# Altium PCB LCD3.5.PcbDoc
Units mm, origin at the board's own origin, x right, y up, seen from the top; angles counter-clockwise.
Board outline 54.74 x 95.63 mm, 2 copper layers (Top Layer, Bottom Layer); 20 components, 48 nets, 124 pads, 80 vias.
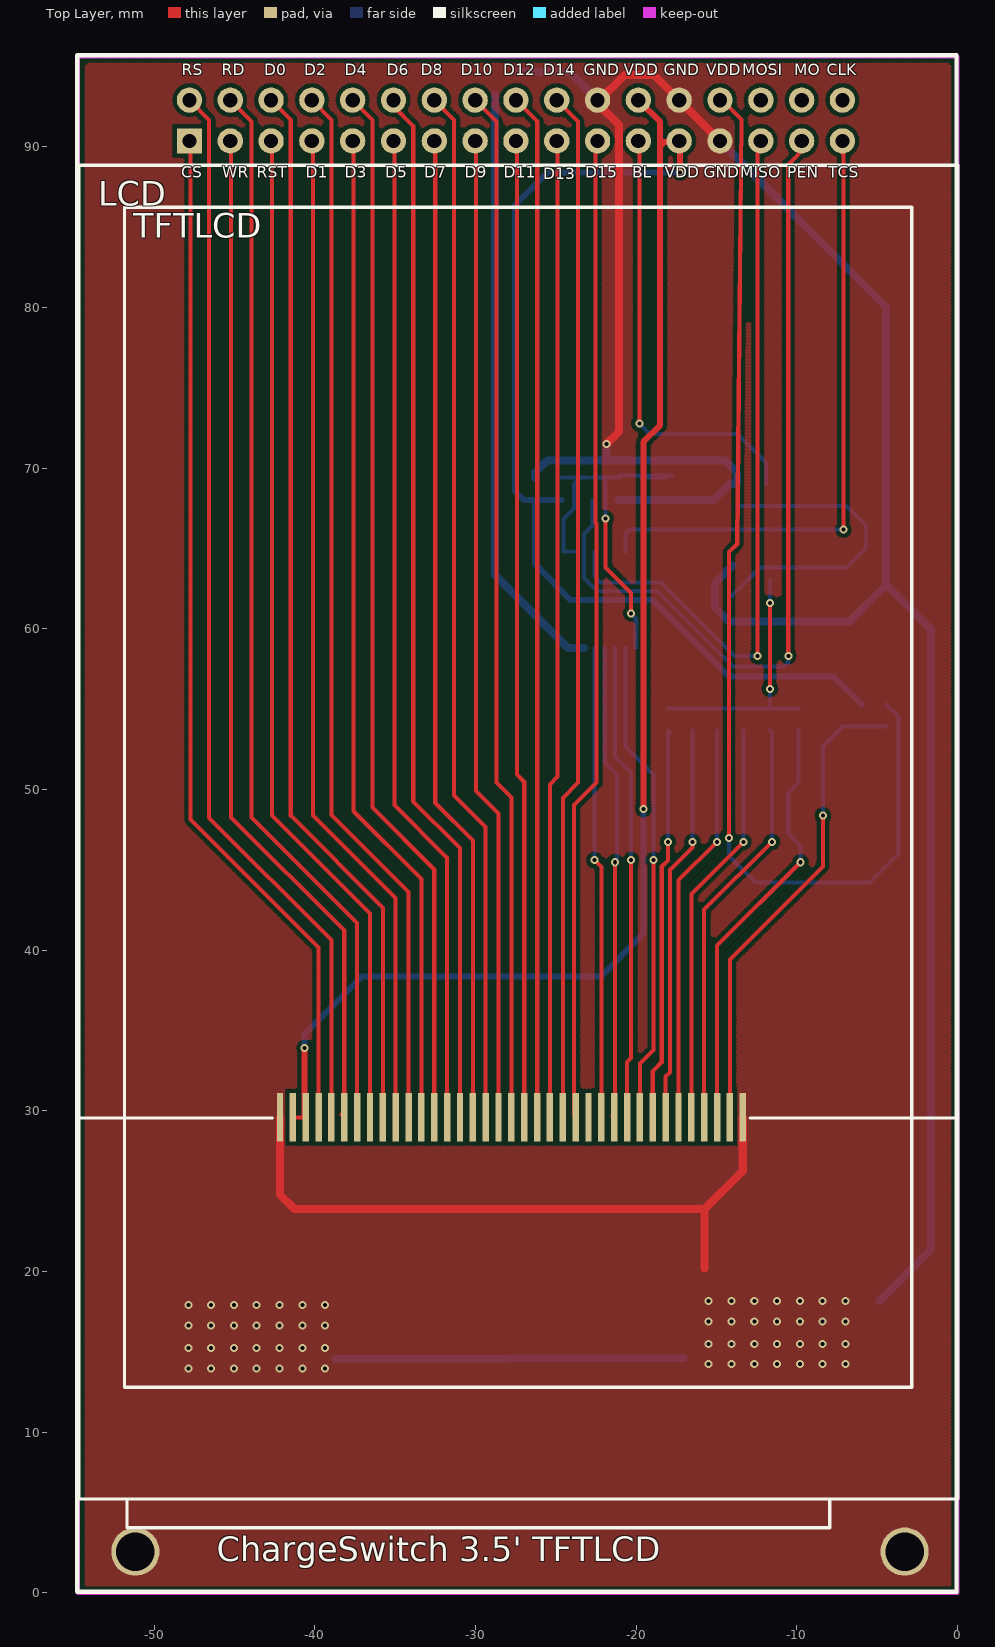
[diagram p0: Top Layer view]
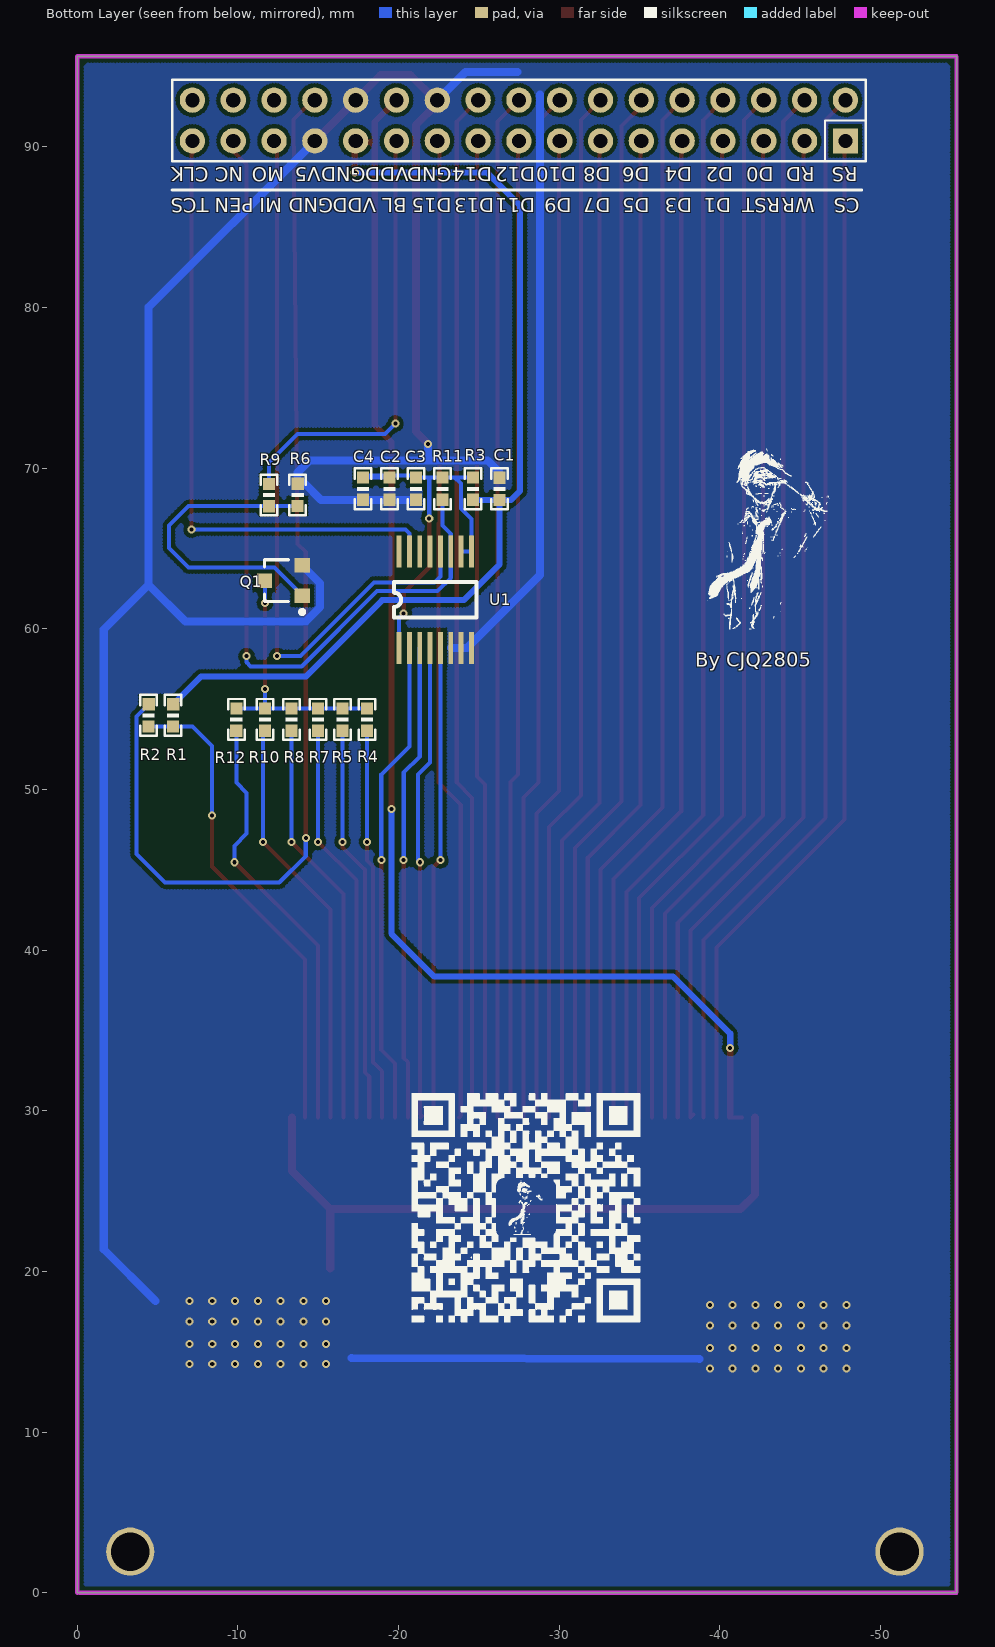
[diagram p1: Bottom Layer view, seen from below]

## Layer stack, top to bottom
Top Solder: solder mask 0.0102, Solder Resist, Dk 3.5
Top Layer: signal copper 0.0356
Dielectric 1: dielectric 0.32, FR-4, Dk 4.8
Bottom Layer: signal copper 0.0356
Bottom Solder: solder mask 0.0102, Solder Resist, Dk 3.5

## Board outline
-54.737,0 -54.737,95.631 0,95.631 0,0

## Design rules (kind name [scope] priority, off if disabled: settings)
Clearance [All] p1: gap=0.254 ignorepadtopadclearanceinfootprint=FALSE except(0: Arc-Hole Track-Hole SMDPad-Hole THPad-Hole Via-Hole Fill-Hole Poly-Hole Region-Hole Text-Hole)
PlaneClearance [All] p1: clearance=0.5
PlaneConnect [All] p1: planeconnectstyle=Direct reliefexpansion=0.508 reliefentries=4 reliefconductorwidth=0.254 reliefairgap=0.254
PolygonConnect [All] p1: connectstyle=Direct reliefconductorwidth=0.254 reliefentries=4 polygonreliefangle="90 Angle" airgapwidth=0.254
RoutingVias [All] p1: holewidth=0.711 width=1.27 viastyle="Through Hole" minholewidth=0.711 minwidth=1.27 maxholewidth=0.711 maxwidth=1.27
SolderMaskExpansion [All] p1: expansion=0.102
Width [All] p1: maxlimit=0.254 minlimit=0.254 preferedwidth=0.254
28 further rules are at their usual default settings.

## Components (designator, comment, footprint, x,y, rotation, side; value= is the part's Value field where it differs from the comment)
C1 "104" 0603P -26.289,68.707 r270 bottom
C2 "10uF" 0603P -19.43,68.707 r90 bottom
C3 "104" 0603P -21.08,68.707 r90 bottom
C4 "104" 0603P -17.779,68.707 r90 bottom
LCD "TFT_LCD2" DB2*17-3.5 -54.795,95.694 r0 top
Q1 "S8050" SOT-23R -12.954,62.992 r90 bottom
R1 "0R" 0603P -5.969,54.61 r270 bottom
R2 "0R" 0603P -4.445,54.61 r270 bottom
R3 "10R" 0603P -24.635,68.707 r90 bottom
R4 "10R" 0603P -18.034,54.356 r270 bottom
R5 "10R" 0603P -16.51,54.356 r270 bottom
R6 "10K" 0603P -13.716,68.326 r90 bottom
R7 "10R" 0603P -14.986,54.356 r270 bottom
R8 "10R" 0603P -13.335,54.356 r270 bottom
R9 "1K" 0603P -11.938,68.326 r270 bottom
R10 "10R" 0603P -11.684,54.356 r270 bottom
R11 "100K" 0603P -22.733,68.707 r90 bottom
R12 "10R" 0603P -9.906,54.356 r270 bottom
TFTLCD "TFT3.5'" TFT3.5' -54.7,5.842 r0 top
U1 "XPT2046" SSOP16 -20.034,58.801 r90 bottom

## Footprints (in the part's own frame and the unit in brackets; to place one, negate y for a bottom-side part, rotate by r counter-clockwise, add the part's x,y. Pads: shape width x height; smd on the part's side, far side on the other; paste and mask are expansions set on the pad)
0603P [mil]
  rect 30x30 smd: 1(-27,0) 2(27.5,-0.06)
  silkscreen extent -50,-20 50,20
DB2*17-3.5 [mil]
  rect 62x62 hole 35: 1(275,-210)
  round 62 hole 35: 2(275,-110) 3(375,-210) 4(375,-110) 5(475,-210) 6(475,-110) 7(575,-210) 8(575,-110) 9(675,-210) 10(675,-110) 11(775,-210) 12(775,-110) 13(875,-210) 14(875,-110) 15(975,-210) 16(975,-110) 17(1075,-210) 18(1075,-110) 19(1175,-210) 20(1175,-110) 21(1275,-210) 22(1275,-110) 23(1375,-210) 24(1375,-110) 25(1475,-210) 26(1475,-110) 27(1575,-210) 28(1575,-110) 29(1675,-210) 30(1675,-110) 31(1775,-210) 32(1775,-110) 33(1875,-210) 34(1875,-110)
  silkscreen extent 0,-3765 2155,0
SOT-23R [mm]
  rect 0.9x0.95 smd: 1(0.95,-1.048) 2(-0.95,-1.048) 3(0,1.302)
  silkscreen extent -2.07,-1.17 1.3,1.3
SSOP16 [mm]
  rect 2x0.3 smd: 1(0,0) 2(0,-0.643) 3(0,-1.286) 4(0,-1.929) 5(0,-2.572) 6(0,-3.215) 7(0,-3.858) 8(0,-4.501) 9(6,-4.501) 10(6,-3.858) 11(6,-3.215) 12(6,-2.572) 13(6,-1.929) 14(6,-1.286) 15(6,-0.643) 16(6,0)
  silkscreen extent 1.89,-4.82 4.11,0.32
TFT3.5' [mm]
  rect 0.4x3 smd: 1(12.526,23.749) 2(13.326,23.749) 3(14.126,23.749) 4(14.926,23.749) 5(15.726,23.749) 6(16.526,23.749) 7(17.326,23.749) 8(18.126,23.749) 9(18.926,23.749) 10(19.726,23.749) 11(20.526,23.749) 12(21.326,23.749) 13(22.126,23.749) 14(22.926,23.749) 15(23.726,23.749) 16(24.526,23.749) 17(25.326,23.749) 18(26.126,23.749) 19(26.926,23.749) 20(27.726,23.749) 21(28.526,23.749) 22(29.326,23.749) 23(30.126,23.749) 24(30.926,23.749) 25(31.726,23.749) 26(32.526,23.749) 27(33.326,23.749) 28(34.126,23.749) 29(34.926,23.749) 30(35.726,23.749) 31(36.526,23.749) 32(37.326,23.749) 33(38.126,23.749) 34(38.926,23.749) 35(39.726,23.749) 36(40.526,23.749) 37(41.326,23.749)
  silkscreen extent 0,-1.8 54.7,83

## Part data
C1 C2 C3 C4: library part C
Q1: library part NPN, "8050/BCW846/BCW847"
R1 R2 R3 R4 R5 R6 R7 R8 R9 R10 R11 R12: library part R
TFTLCD: "3.5寸,带触摸,分辨率:480*320"
U1: library part ADS7843

## Free pads (board coordinates)
  round 3 hole 2.4: 5(-51.177,2.56) 5(-3.3,2.56)

## Via types
v1: diameter 0.5, hole 0.25, Top Layer to Bottom Layer, 78 vias
v2: diameter 0.5, hole 0.25, Top Layer to Bottom Layer, tented both sides, 2 vias

## Nets (pads, with @x,y where several pads share a name; then routed paths per layer and width w, separated by ;. In a path a pad name is that pad's centre, name@x,y a point inside that pad or via, vN(x,y) a via of type N, cw(c..) or ccw(c..) an arc to the next point about the centre after c; other vN are vias at no path point)
BL_CTR: LCD.23 R9.1 | length 28
  Top Layer w0.254: v2(-19.812,72.771) -19.812,89.789 -19.685,89.916 -19.939,90.17 LCD.23@-19.812,90.297
  Bottom Layer w0.254: v2(-19.812,72.771) -19.166,72.125 -13.705,72.125 -11.938,70.358 R9.1
BL_VDD: LCD.28 R2.1 | length 69.4
  Top Layer w0.254: LCD.28@-14.732,92.837 -14.605,92.837 -13.462,91.694 -13.716,65.279 ; v1(-14.224,46.99) -14.224,64.77 -13.716,65.278
  Bottom Layer w0.254: v1(-14.224,46.99) -14.224,45.847 -12.573,44.196 -5.461,44.196 -3.681,45.976 -3.681,54.532 R2.1
CLK: LCD.34
GND: C1.1 C2.1 C3.1 C4.1 LCD.22 LCD.26 LCD.27 pad.5 Q1.1 R6.2 TFTLCD.1 TFTLCD.37 U1.6 U1.7 U1.8 | length 255.9
  Top Layer w0.5: TFTLCD.1 -42.174,24.775 -41.275,23.876 -15.748,23.876 ; v1(-21.844,71.501) -21.082,72.263 -21.082,91.364 -22.352,92.634 -22.352,92.837 -20.739,94.45 -18.885,94.45 LCD.27@-14.732,90.297 ; -15.748,20.19 -15.748,23.876 ; TFTLCD.37 -13.374,26.25 -15.748,23.876
  Bottom Layer w0.5: -38.735,14.555 -17.067,14.605 ; -28.804,93.239 -28.804,63.348 -24.257,58.801 U1.7 U1.6 ; -27.392,94.65 -24.165,94.65 LCD.22@-22.352,92.837 ; C1.1 -26.289,69.723 -25.527,70.485 -21.844,70.485 ; v1(-21.844,71.501) -21.844,70.485 ; C3.1@-21.105,68.023 C4.1@-17.804,68.023 ; C4.1 -15.179,68.021 -14.176,69.025 R6.2 -13.718,69.725 -14.478,70.485 -21.844,70.485 ; LCD.27@-14.732,90.297 -4.445,80.01 -4.445,62.738 ; Q1.1 -15.113,62.831 -15.113,61.341 -14.224,60.452 -6.731,60.452 -4.445,62.738 ; -4.867,18.161 -1.651,21.377 -1.651,59.944 -4.445,62.738
  other v1: -47.879,13.97 -46.461,13.97 -45.043,13.97 -43.625,13.97 -42.206,13.97 -40.788,13.97 -39.37,13.97 -15.494,14.224 -14.076,14.224 -12.658,14.224 -11.24,14.224 -9.821,14.224 -8.403,14.224 -6.985,14.224 -47.879,15.24 -46.461,15.24 -45.043,15.24 -43.625,15.24 -42.206,15.24 -40.788,15.24 -39.37,15.24 -15.494,15.494 -14.076,15.494 -12.658,15.494 -11.24,15.494 -9.821,15.494 -8.403,15.494 -6.985,15.494 -47.879,16.637 -46.461,16.637 -45.043,16.637 -43.625,16.637 -42.206,16.637 -40.788,16.637 -39.37,16.637 -15.494,16.891 -14.076,16.891 -12.658,16.891 -11.24,16.891 -9.821,16.891 -8.403,16.891 -6.985,16.891 -47.879,17.907 -46.461,17.907 -45.043,17.907 -43.625,17.907 -42.206,17.907 -40.788,17.907 -39.37,17.907 -15.494,18.161 -14.076,18.161 -12.658,18.161 -11.24,18.161 -9.821,18.161 -8.403,18.161 -6.985,18.161
LCD_CS: LCD.1 TFTLCD.4 | length 64
  Top Layer w0.254: LCD.1@-47.752,90.297 -47.752,48.133 -39.774,40.155 TFTLCD.4
LCD_D0: LCD.6 TFTLCD.9 | length 66.1
  Top Layer w0.254: LCD.6@-42.672,92.837 -41.504,91.669 -41.504,48.362 -35.774,42.632 TFTLCD.9
LCD_D1: LCD.7 TFTLCD.10 | length 62.8
  Top Layer w0.254: LCD.7@-40.132,90.297 -40.132,48.387 -34.974,43.229 TFTLCD.10
LCD_D2: LCD.8 TFTLCD.11 | length 65.7
  Top Layer w0.254: LCD.8@-40.132,92.837 -38.964,91.669 -38.964,48.412 -34.174,43.623 TFTLCD.11
LCD_D3: LCD.9 TFTLCD.12 | length 62.5
  Top Layer w0.254: LCD.9@-37.592,90.297 -37.592,48.641 -33.374,44.423 TFTLCD.12
LCD_D4: LCD.10 TFTLCD.13 | length 65.3
  Top Layer w0.254: LCD.10@-37.592,92.837 -36.424,91.669 -36.424,48.87 -32.574,45.02 TFTLCD.13
LCD_D5: LCD.11 TFTLCD.14 | length 62.1
  Top Layer w0.254: LCD.11@-35.052,90.297 -35.052,49.022 -31.774,45.744 TFTLCD.14
LCD_D6: LCD.12 TFTLCD.15 | length 64.9
  Top Layer w0.254: LCD.12@-35.052,92.837 -35.052,92.456 -33.884,91.288 -33.884,49.251 -30.974,46.341 TFTLCD.15
LCD_D7: LCD.13 TFTLCD.16 | length 61.7
  Top Layer w0.254: LCD.13@-32.512,90.297 -32.512,49.149 -30.174,46.811 TFTLCD.16
LCD_D8: LCD.14 TFTLCD.17 | length 64.5
  Top Layer w0.254: LCD.14@-32.512,92.837 -31.344,91.669 -31.344,49.632 -29.374,47.662 TFTLCD.17
LCD_D9: LCD.15 TFTLCD.18 | length 61.3
  Top Layer w0.254: LCD.15@-29.972,90.297 -29.972,49.911 -28.574,48.513 TFTLCD.18
LCD_D10: LCD.16 TFTLCD.19 | length 64.2
  Top Layer w0.254: LCD.16@-29.972,92.837 -28.702,91.567 -28.702,50.419 -27.774,49.491 TFTLCD.19
LCD_D11: LCD.17 TFTLCD.20 | length 60.9
  Top Layer w0.254: LCD.17@-27.432,90.297 -27.432,50.927 -26.974,50.469 TFTLCD.20
LCD_D12: LCD.18 TFTLCD.21 | length 63.8
  Top Layer w0.254: LCD.18@-27.432,92.837 -26.162,91.567 -26.162,29.603 TFTLCD.21
LCD_D13: LCD.19 TFTLCD.22 | length 60.9
  Top Layer w0.254: TFTLCD.22 -25.374,50.318 -24.892,50.8 LCD.19@-24.892,90.297
LCD_D14: LCD.20 TFTLCD.23 | length 64.2
  Top Layer w0.254: LCD.20@-24.892,92.837 -23.622,91.567 -23.622,50.419 -24.574,49.467 TFTLCD.23
LCD_D15: LCD.21 TFTLCD.24 | length 61.4
  Top Layer w0.254: TFTLCD.24 -23.872,29.689 -23.872,49.026 -22.475,50.423 -22.475,66.541 -22.539,66.605 -22.539,90.11 LCD.21@-22.352,90.297
LCD_RD: LCD.4 TFTLCD.7 | length 66.5
  Top Layer w0.254: LCD.4@-45.212,92.837 -43.942,91.567 -43.942,48.26 -37.374,41.692 TFTLCD.7
LCD_RS: LCD.2 TFTLCD.5 | length 66.9
  Top Layer w0.254: LCD.2@-47.752,92.837 -46.584,91.669 -46.584,48.235 -38.974,40.625 TFTLCD.5
LCD_RST: LCD.5 TFTLCD.8 | length 63.2
  Top Layer w0.254: LCD.5@-42.672,90.297 -42.672,48.387 -36.574,42.289 TFTLCD.8
LCD_WR: LCD.3 TFTLCD.6 | length 63.9
  Top Layer w0.254: LCD.3@-45.212,90.297 -45.212,48.26 -38.174,41.222 TFTLCD.6 TFTLCD.6@-38.354,29.771
LEDA: R1.2 R2.2 TFTLCD.36 | length 30
  Top Layer w0.254: TFTLCD.36 -14.174,39.42 -8.382,45.212 v1(-8.382,48.387)
  Bottom Layer w0.254: v1(-8.382,48.387) -8.382,52.705 -7.175,53.911 R1.2 R2.2
LEDK1: R4.2 TFTLCD.30 | length 24.6
  Top Layer w0.254: TFTLCD.30 -18.974,32.461 -18.415,33.02 -18.415,45.209 -18.034,45.59 v1(-18.034,46.736)
  Bottom Layer w0.254: v1(-18.034,46.736) -18.034,53.405 -17.907,53.532 R4.2
LEDK2: R5.2 TFTLCD.31 | length 25
  Top Layer w0.254: TFTLCD.31 -18.174,32.118 -17.907,32.385 -17.907,44.998 -16.51,46.395 v2(-16.51,46.738)
  Bottom Layer w0.254: v2(-16.51,46.738) -16.51,46.612 -16.508,46.611 R5.2
LEDK3: R7.2 TFTLCD.32 | length 25.1
  Top Layer w0.254: TFTLCD.32 -17.374,44.348 v1(-14.986,46.736)
  Bottom Layer w0.254: v1(-14.986,46.736) -14.984,46.738 R7.2
LEDK4: R8.2 TFTLCD.33 | length 25.4
  Top Layer w0.254: TFTLCD.33 -16.574,43.497 v1(-13.335,46.736)
  Bottom Layer w0.254: v1(-13.335,46.736) -13.333,46.738 R8.2
LEDK5: R10.2 TFTLCD.34 | length 25.9
  Top Layer w0.254: TFTLCD.34 -15.774,42.519 v1(-11.557,46.736)
  Bottom Layer w0.254: R10.2 -11.557,53.532 v1(-11.557,46.736)
LEDK6: R12.2 TFTLCD.35 | length 26.8
  Top Layer w0.254: TFTLCD.35 -14.974,40.271 v1(-9.779,45.466)
  Bottom Layer w0.254: R12.2 -9.904,50.421 -10.541,49.784 -10.541,47.244 -9.779,46.482 v1(-9.779,45.466)
MO: LCD.32
MOSI: LCD.30
NetQ1_2: Q1.2 R6.1 R9.2 | length 19.5
  Bottom Layer w0.254: Q1.2 -14.002,62.106 -12.285,63.823 -6.916,63.823 -5.715,65.024 -5.715,66.421 -6.921,67.627 R9.2 -11.949,67.64 R6.1
NetQ1_3: Q1.3 R4.1 R5.1 R7.1 R8.1 R10.1 R12.1 | length 16.1
  Top Layer w0.254: v1(-11.684,56.261) v1(-11.684,61.595)
  Bottom Layer w0.254: R4.1 R5.1 R7.1 R8.1 R10.1 ; v1(-11.684,56.261) R10.1 ; v1(-11.684,61.595) -11.684,62.96 Q1.3 ; R12.1 R10.1
T_BUSY: U1.13
T_CLK: U1.16
T_CS: LCD.33 U1.15 | length 39.3
  Top Layer w0.254: v1(-7.112,66.167) -7.112,89.535 -7.493,89.916 LCD.33@-7.112,90.297
  Bottom Layer w0.254: U1.15 -20.677,65.937 -20.432,66.182 -7.127,66.182 v1(-7.112,66.167)
T_MISO: LCD.29 U1.12 | length 45.9
  Top Layer w0.254: v1(-12.446,58.293) -12.446,90.043 LCD.29@-12.192,90.297
  Bottom Layer w0.254: U1.12 -22.606,63.246 -22.225,62.865 -18.459,62.865 -13.887,58.293 v1(-12.446,58.293)
T_MOSI: U1.14
T_PEN: LCD.31 R11.1 U1.11 | length 53.1
  Top Layer w0.254: v1(-10.541,58.293) -10.541,88.9 -9.398,90.043 LCD.31@-9.652,90.297
  Bottom Layer w0.254: R11.1 -22.733,66.421 -23.249,65.905 U1.11 -23.249,63.171 -22.435,62.357 -18.669,62.357 -13.974,57.662 -10.795,57.662 -10.541,57.916 v1(-10.541,58.293)
TVDD: C2.2 C3.2 C4.2 R3.2 R11.2 U1.1 U1.9 U1.10 | length 25.3
  Top Layer w0.254: v1(-21.908,66.866) -21.908,63.818 -20.32,62.23 v1(-20.32,60.96)
  Bottom Layer w0.254: R3.2 -23.495,69.406 ; U1.10 U1.9 -24.535,66.821 -23.873,67.482 -23.873,69.027 -23.495,69.406 ; R11.2@-22.987,69.406 -23.495,69.406 ; R11.2 -21.908,69.406 ; v1(-21.908,66.866) -21.908,69.406 ; C3.2 -21.908,69.406 ; C3.2@-21.082,69.532 C4.2@-17.781,69.532 ; v1(-20.32,60.96) -20.034,60.674 U1.1 ; C2.2@-19.686,69.406 C2.2 C4.2@-18.036,69.406
VCC3.3: C1.2 LCD.24 LCD.25 R1.1 R3.1 TFTLCD.2 TFTLCD.3 | length 145.7
  Top Layer w0.254: TFTLCD.2 TFTLCD.3 TFTLCD.3@-40.64,29.657
  Top Layer w0.381: TFTLCD.3@-40.64,29.657 v1(-40.64,33.909) ; LCD.24@-19.812,92.837 -18.519,91.544 -18.519,90.043 ; v1(-19.558,48.768) -19.558,71.632 -18.519,72.671 -18.519,90.043 ; v1(-17.272,88.392) -17.272,90.297 -18.265,90.297 -18.519,90.043
  Bottom Layer w0.254: R3.1@-24.648,68.008 R3.1
  Bottom Layer w0.381: v1(-40.64,33.909) -40.64,34.798 -37.084,38.354 -22.225,38.354 -19.558,41.021 v1(-19.558,48.768) ; R3.1@-24.648,68.008 C1.2 ; v1(-17.272,88.392) -25.527,88.392 -27.55,86.369 -27.55,68.571 -26.987,68.008 C1.2 ; R1.1 -7.696,57.023 -14.224,57.023 -18.986,61.785 -24.066,61.785 -26.287,64.006 C1.2
X+: TFTLCD.29 U1.2 | length 30.3
  Top Layer w0.254: TFTLCD.29 -19.774,32.931 -18.923,33.782 v1(-18.923,45.593)
  Bottom Layer w0.254: U1.2 -20.677,52.681 -18.923,50.927 v1(-18.923,45.593)
X-: TFTLCD.27 U1.4 | length 29.7
  Top Layer w0.254: TFTLCD.27 -21.463,29.68 -21.336,29.807 v1(-21.336,45.466)
  Bottom Layer w0.254: U1.4 -21.963,51.681 -21.209,50.927 -21.209,45.593 v1(-21.336,45.466)
Y+: TFTLCD.28 U1.3 | length 29.7
  Top Layer w0.254: TFTLCD.28 -20.574,33.02 -20.32,33.274 v1(-20.32,45.593)
  Bottom Layer w0.254: U1.3 -21.32,52.054 -20.32,51.054 v1(-20.32,45.593)
Y-: TFTLCD.26 U1.5 | length 29.4
  Top Layer w0.254: v1(-22.606,45.593) -22.174,45.161 TFTLCD.26
  Bottom Layer w0.254: v1(-22.606,45.593) U1.5
pads on no net: TFTLCD.25

## Polygon pours and split planes (outlines as drawn)
GND on Bottom Layer "GND_L02_P006" (hatched 90Degree grid 0.2 track 0.3, remove dead copper, pour order 6): -48.641,18.923 -48.641,12.319 -38.227,12.319 -37.592,12.954 -37.592,18.669 -48.641,18.669 -49.022,19.05
GND on Bottom Layer "GND_L02_P002" (hatched 90Degree grid 0.2 track 0.3, remove dead copper, pour order 2): -17.653,18.923 -17.653,13.462 -16.637,12.446 -16.383,12.7 -4.699,12.7 -4.699,18.542 -5.842,19.685
GND on Bottom Layer "GND_L02_P024" (hatched 90Degree grid 0.2 track 0.3, remove dead copper, pour order 24): -59.975,46.275 -57.225,49.025 -57.225,100.625 1.55,100.625 10,92.175 7.25,89.425 7.25,-3.15 -59.7,-3.15 -60.75,-4.2 -66.125,1.175 -66.125,16.65 -60.75,16.65 -59.825,17.575
GND on Top Layer "GND_L01_P026" (hatched 90Degree grid 0.2 track 0.3, remove dead copper, pour order 26): -57.075,99.25 -57.825,98.5 -57.825,-6.35 7.725,-6.35 12.925,-1.15 9.85,1.925 9.85,102.3
GND on Top Layer "GND_L01_P004" (hatched 90Degree grid 0.2 track 0.3, remove dead copper, pour order 4): -18.288,19.304 -18.415,19.177 -18.415,12.319 -4.191,12.319 -3.556,12.954 -4.826,14.224 -4.826,20.193 -18.669,20.193 -18.796,20.066

## Keep-outs
Keep-Out Layer:
  lines w0.254: -0.127,0 -54.737,0 -54.737,95.631 0,95.631 0,0

## Silkscreen, mask and mechanical layers (free items; w line width, h text height)
Top Overlay:
  text "ChargeSwitch 3.5' TFTLCD" at -46.101,1.955 h1.52
Bottom Overlay:
  drawing of 8112 lines, arcs and shapes, not listed
  text "By CJQ2805" at -38.475,57.325 h1.52

## Text inside footprints (layer, text, board x,y; h text height)
LCD: Top Overlay "D14" at -25.785,94.46 h0.71; Top Overlay "D7" at -33.205,88.074 h0.71; Top Overlay "RS" at -48.285,94.46 h0.71; Top Overlay "CS" at -48.318,88.074 h0.71; Top Overlay "WR" at -45.778,88.074 h0.71; Top Overlay "RST" at -43.619,88.074 h0.71; Top Overlay "D1" at -40.571,88.074 h0.71; Top Overlay "D2" at -40.66,94.46 h0.71; Top Overlay "D3" at -38.158,88.074 h0.71; Top Overlay "D4" at -38.16,94.46 h0.71; Top Overlay "D5" at -35.618,88.074 h0.71; Top Overlay "D6" at -35.535,94.46 h0.71; Top Overlay "D8" at -33.41,94.46 h0.71; Top Overlay "D9" at -30.665,88.074 h0.71; Top Overlay "D13" at -25.785,87.96 h0.71; Top Overlay "D12" at -28.285,94.46 h0.71; Top Overlay "D15" at -23.172,88.074 h0.71; Top Overlay "VDD" at -18.219,88.074 h0.71; Top Overlay "VDD" at -15.66,94.46 h0.71; Top Overlay "GND" at -18.285,94.46 h0.71; Top Overlay "VDD" at -20.785,94.46 h0.71; Top Overlay "D10" at -30.91,94.46 h0.71; Top Overlay "D0" at -43.16,94.46 h0.71; Top Overlay "RD" at -45.785,94.46 h0.71; Top Overlay "GND" at -23.285,94.46 h0.71; Top Overlay "GND" at -15.806,88.074 h0.71; Top Overlay "D11" at -28.252,88.074 h0.71; Top Overlay "PEN" at -10.599,88.074 h0.71; Top Overlay "CLK" at -8.16,94.46 h0.71; Top Overlay "MOSI" at -13.41,94.46 h0.71; Top Overlay "MO" at -10.16,94.46 h0.71; Top Overlay "TCS" at -8.059,88.074 h0.71; Top Overlay "MISO" at -13.52,88.074 h0.71; Top Overlay "BL" at -20.251,88.074 h0.71; Bottom Overlay "CS" at -48.699,86.804 h0.89 r180; Bottom Overlay "RS" at -48.572,88.709 h0.89 r180; Bottom Overlay "RD" at -45.905,88.709 h0.89 r180; Bottom Overlay "WR" at -45.905,86.804 h0.89 r180; Bottom Overlay "D0" at -43.365,88.709 h0.89 r180; Bottom Overlay "RST" at -43.746,86.804 h0.89 r180; Bottom Overlay "D1" at -40.698,86.804 h0.89 r180; Bottom Overlay "D2" at -40.825,88.709 h0.89 r180; Bottom Overlay "D3" at -38.285,86.804 h0.89 r180; Bottom Overlay "D4" at -38.285,88.709 h0.89 r180; Bottom Overlay "D5" at -35.618,86.804 h0.89 r180; Bottom Overlay "D6" at -35.618,88.709 h0.89 r180; Bottom Overlay "D7" at -33.205,86.804 h0.89 r180; Bottom Overlay "D8" at -33.205,88.709 h0.89 r180; Bottom Overlay "D9" at -30.792,86.804 h0.89 r180; Bottom Overlay "D10" at -31.046,88.709 h0.89 r180; Bottom Overlay "D11" at -28.506,86.804 h0.89 r180; Bottom Overlay "D12" at -28.506,88.709 h0.89 r180; Bottom Overlay "D13" at -25.966,86.804 h0.89 r180; Bottom Overlay "D14" at -25.839,88.709 h0.89 r180; Bottom Overlay "D15" at -23.299,86.804 h0.89 r180; Bottom Overlay "GND" at -23.299,88.709 h0.89 r180; Bottom Overlay "BL" at -20.505,86.804 h0.89 r180; Bottom Overlay "VDD" at -20.632,88.709 h0.89 r180; Bottom Overlay "VDD" at -18.6,86.804 h0.89 r180; Bottom Overlay "GND" at -17.965,88.709 h0.89 r180; Bottom Overlay "GND" at -15.933,86.804 h0.89 r180; Bottom Overlay "V5" at -15.171,88.709 h0.89 r180; Bottom Overlay "MI" at -12.758,86.804 h0.89 r180; Bottom Overlay "MO" at -12.885,88.709 h0.89 r180; Bottom Overlay "PEN" at -10.98,86.804 h0.89 r180; Bottom Overlay "NC" at -10.345,88.709 h0.89 r180; Bottom Overlay "TCS" at -8.186,86.804 h0.89 r180; Bottom Overlay "CLK" at -8.186,88.709 h0.89 r180